# EAGLE board proto (EAGLE 7.2.0)

No outline drawn. Coordinates in mm, seen from the top.
Copper layers (1*16): Top 0.035mm / dielectric 1.5mm / Bottom 0.035mm
Design rules "default": minimum track width 10mil, minimum drill 24mil, track to track 8mil, track to pad 8mil, pad to pad 8mil, via to via 8mil, smd to smd 8mil, copper to edge 40mil, drill to drill 8mil, minimum pad ring 10mil, minimum via ring 8mil, stop-mask expansion 4mil, vias tented up to drill 0mil, thermal gap 10mil

## Footprints (pad centres in the part's own frame; a part is rotated, then mirrored left to right if it is on the bottom)
W9326 = smd 4.2 x 0.9: 1 -11.45,0; 2 -11.45,-1.27; 3 -11.45,-2.54; 4 -11.45,-3.81; 5 -11.45,-5.08; 6 -11.45,-6.35; 7 -11.45,-7.62; 21 11.45,-7.62; 22 11.45,-6.35; 23 11.45,-5.08; 24 11.45,-3.81; 25 11.45,-2.54; 26 11.45,-1.27; 27 11.45,0; 28 11.45,1.27; 29 11.45,2.54; 30 11.45,3.81; 31 11.45,5.08; 32 11.45,6.35; 33 11.45,7.62; 47 -11.45,7.62; 48 -11.45,6.35; 49 -11.45,5.08; 50 -11.45,3.81; 51 -11.45,2.54; 52 -11.45,1.27 | smd 0.9 x 4.2: 8 -7.62,-11.45; 9 -6.35,-11.45; 10 -5.08,-11.45; 11 -3.81,-11.45; 12 -2.54,-11.45; 13 -1.27,-11.45; 14 0,-11.45; 15 1.27,-11.45; 16 2.54,-11.45; 17 3.81,-11.45; 18 5.08,-11.45; 19 6.35,-11.45; 20 7.62,-11.45; 34 7.62,11.45; 35 6.35,11.45; 36 5.08,11.45; 37 3.81,11.45; 38 2.54,11.45; 39 1.27,11.45; 40 0,11.45; 41 -1.27,11.45; 42 -2.54,11.45; 43 -3.81,11.45; 44 -5.08,11.45; 45 -6.35,11.45; 46 -7.62,11.45

## Placement (x,y rotation side)
E$1  [W9326]  22.86,24.13 270 top

## Library data of the parts
E$1 = plcc-socket